# Altium PCB MainBoard.PcbDoc (part 1 of 3)
Units mil, origin at the board's own origin, x right, y up, seen from the top; angles counter-clockwise.
Board outline 11417.32 x 3858.27 mil, 2 copper layers (Top Layer, Bottom Layer); 222 components, 205 nets, 1642 pads, 0 vias.
Unrouted connection lines stored in the file: 802.
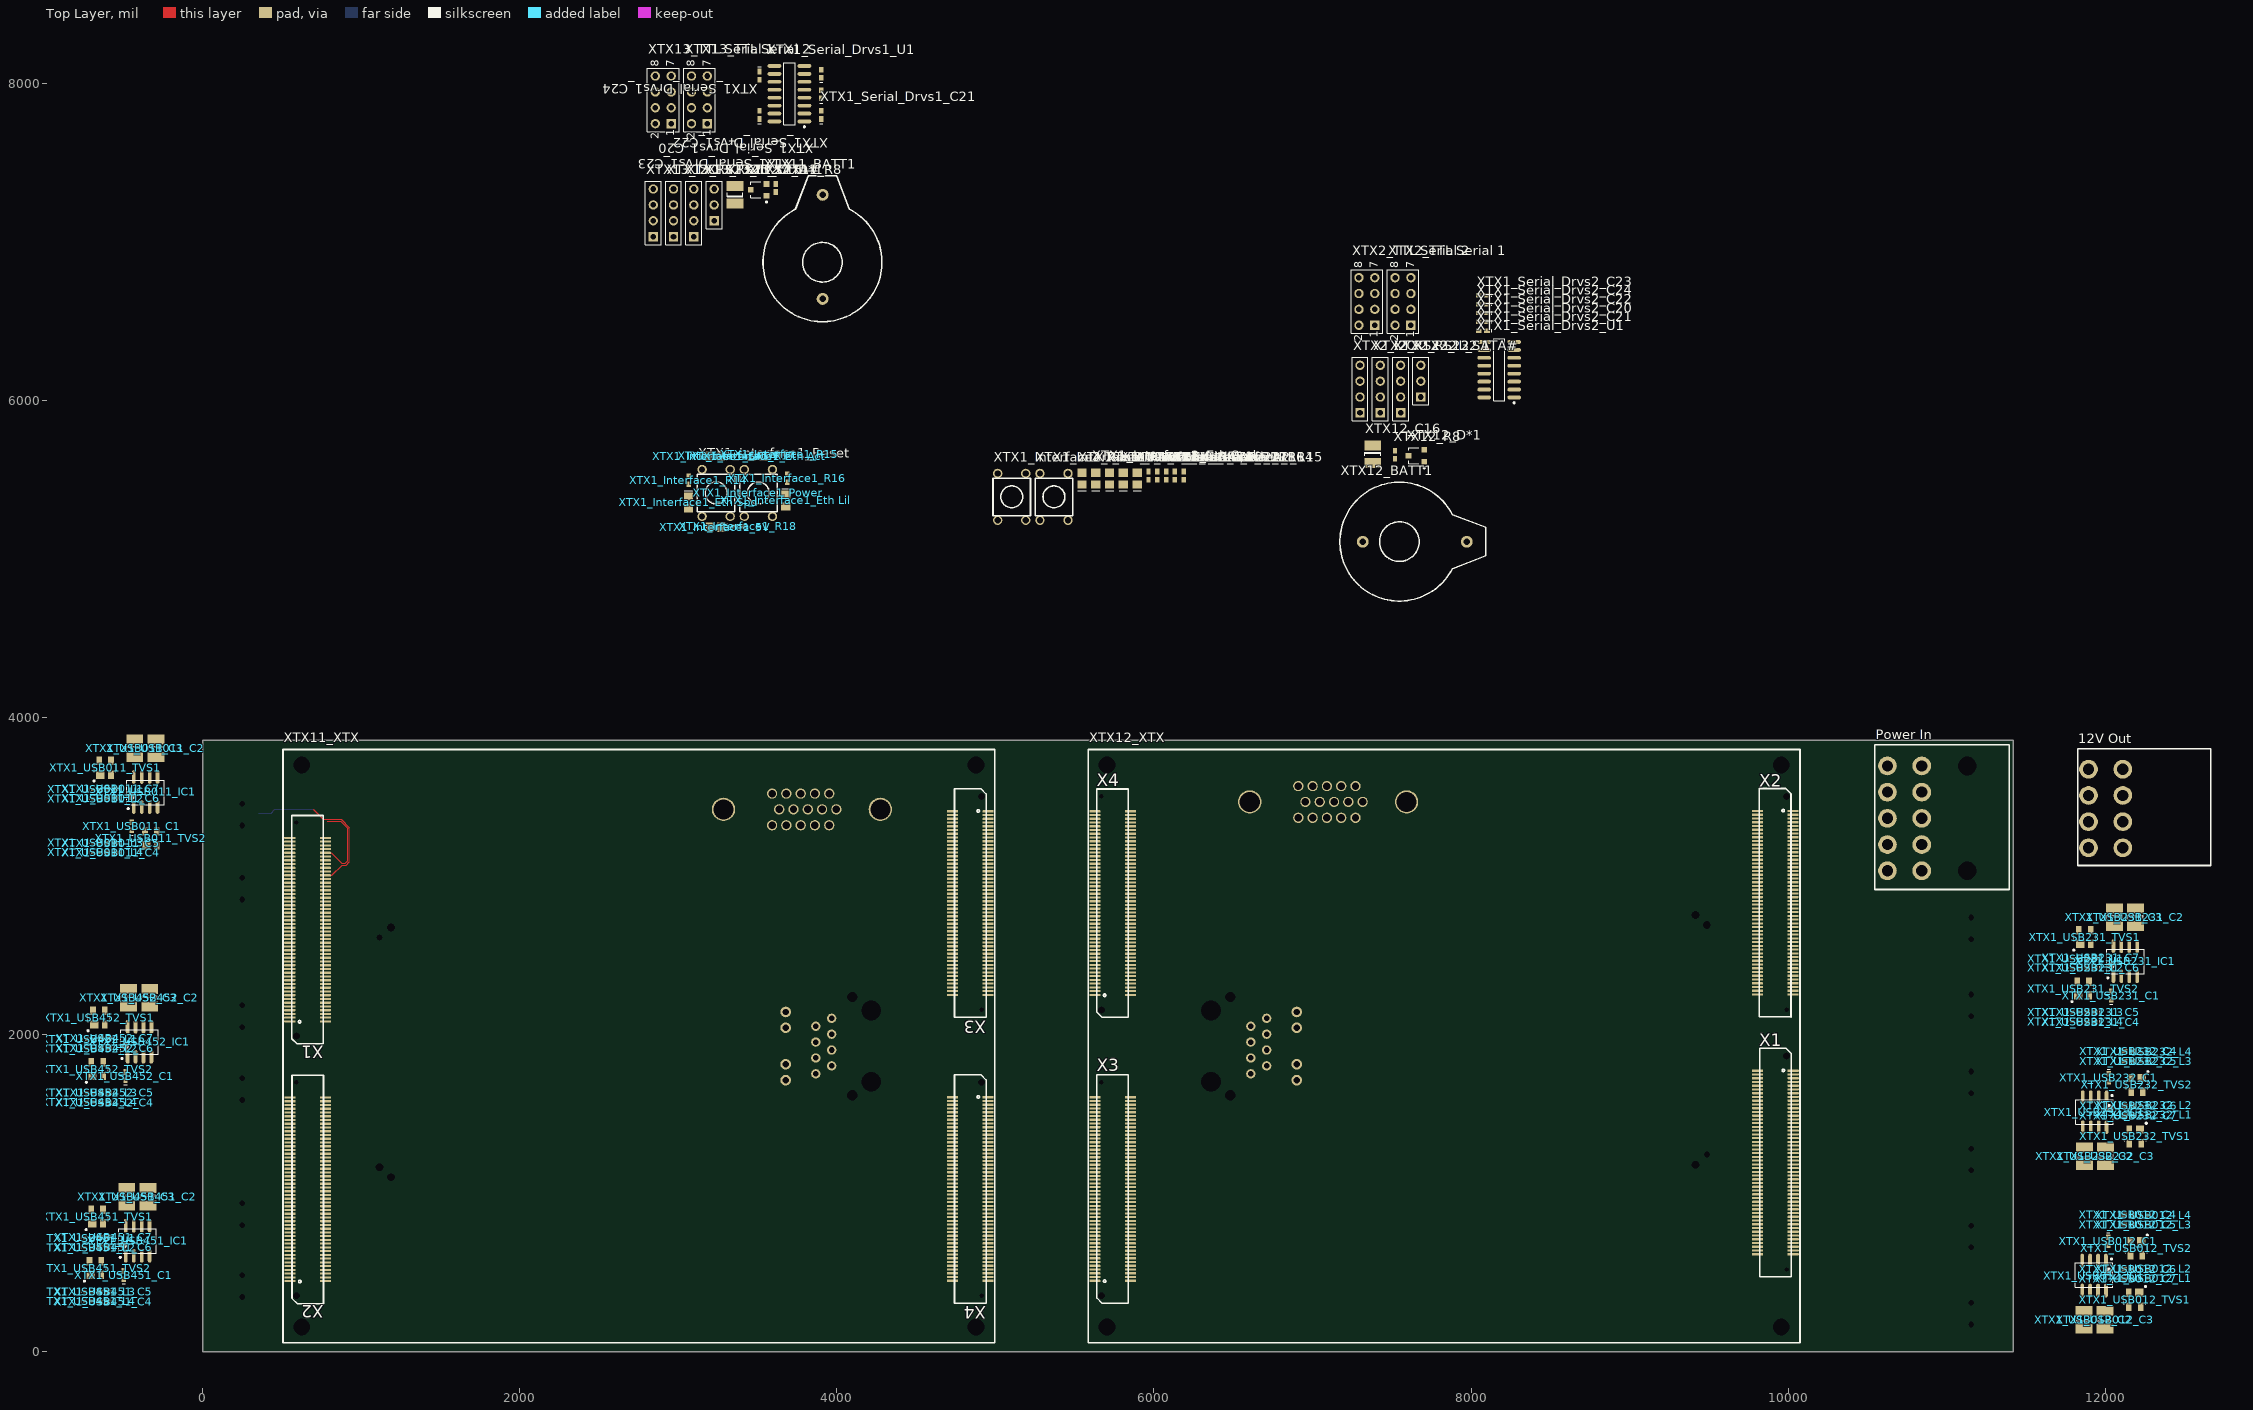
[diagram p0: Top Layer view]
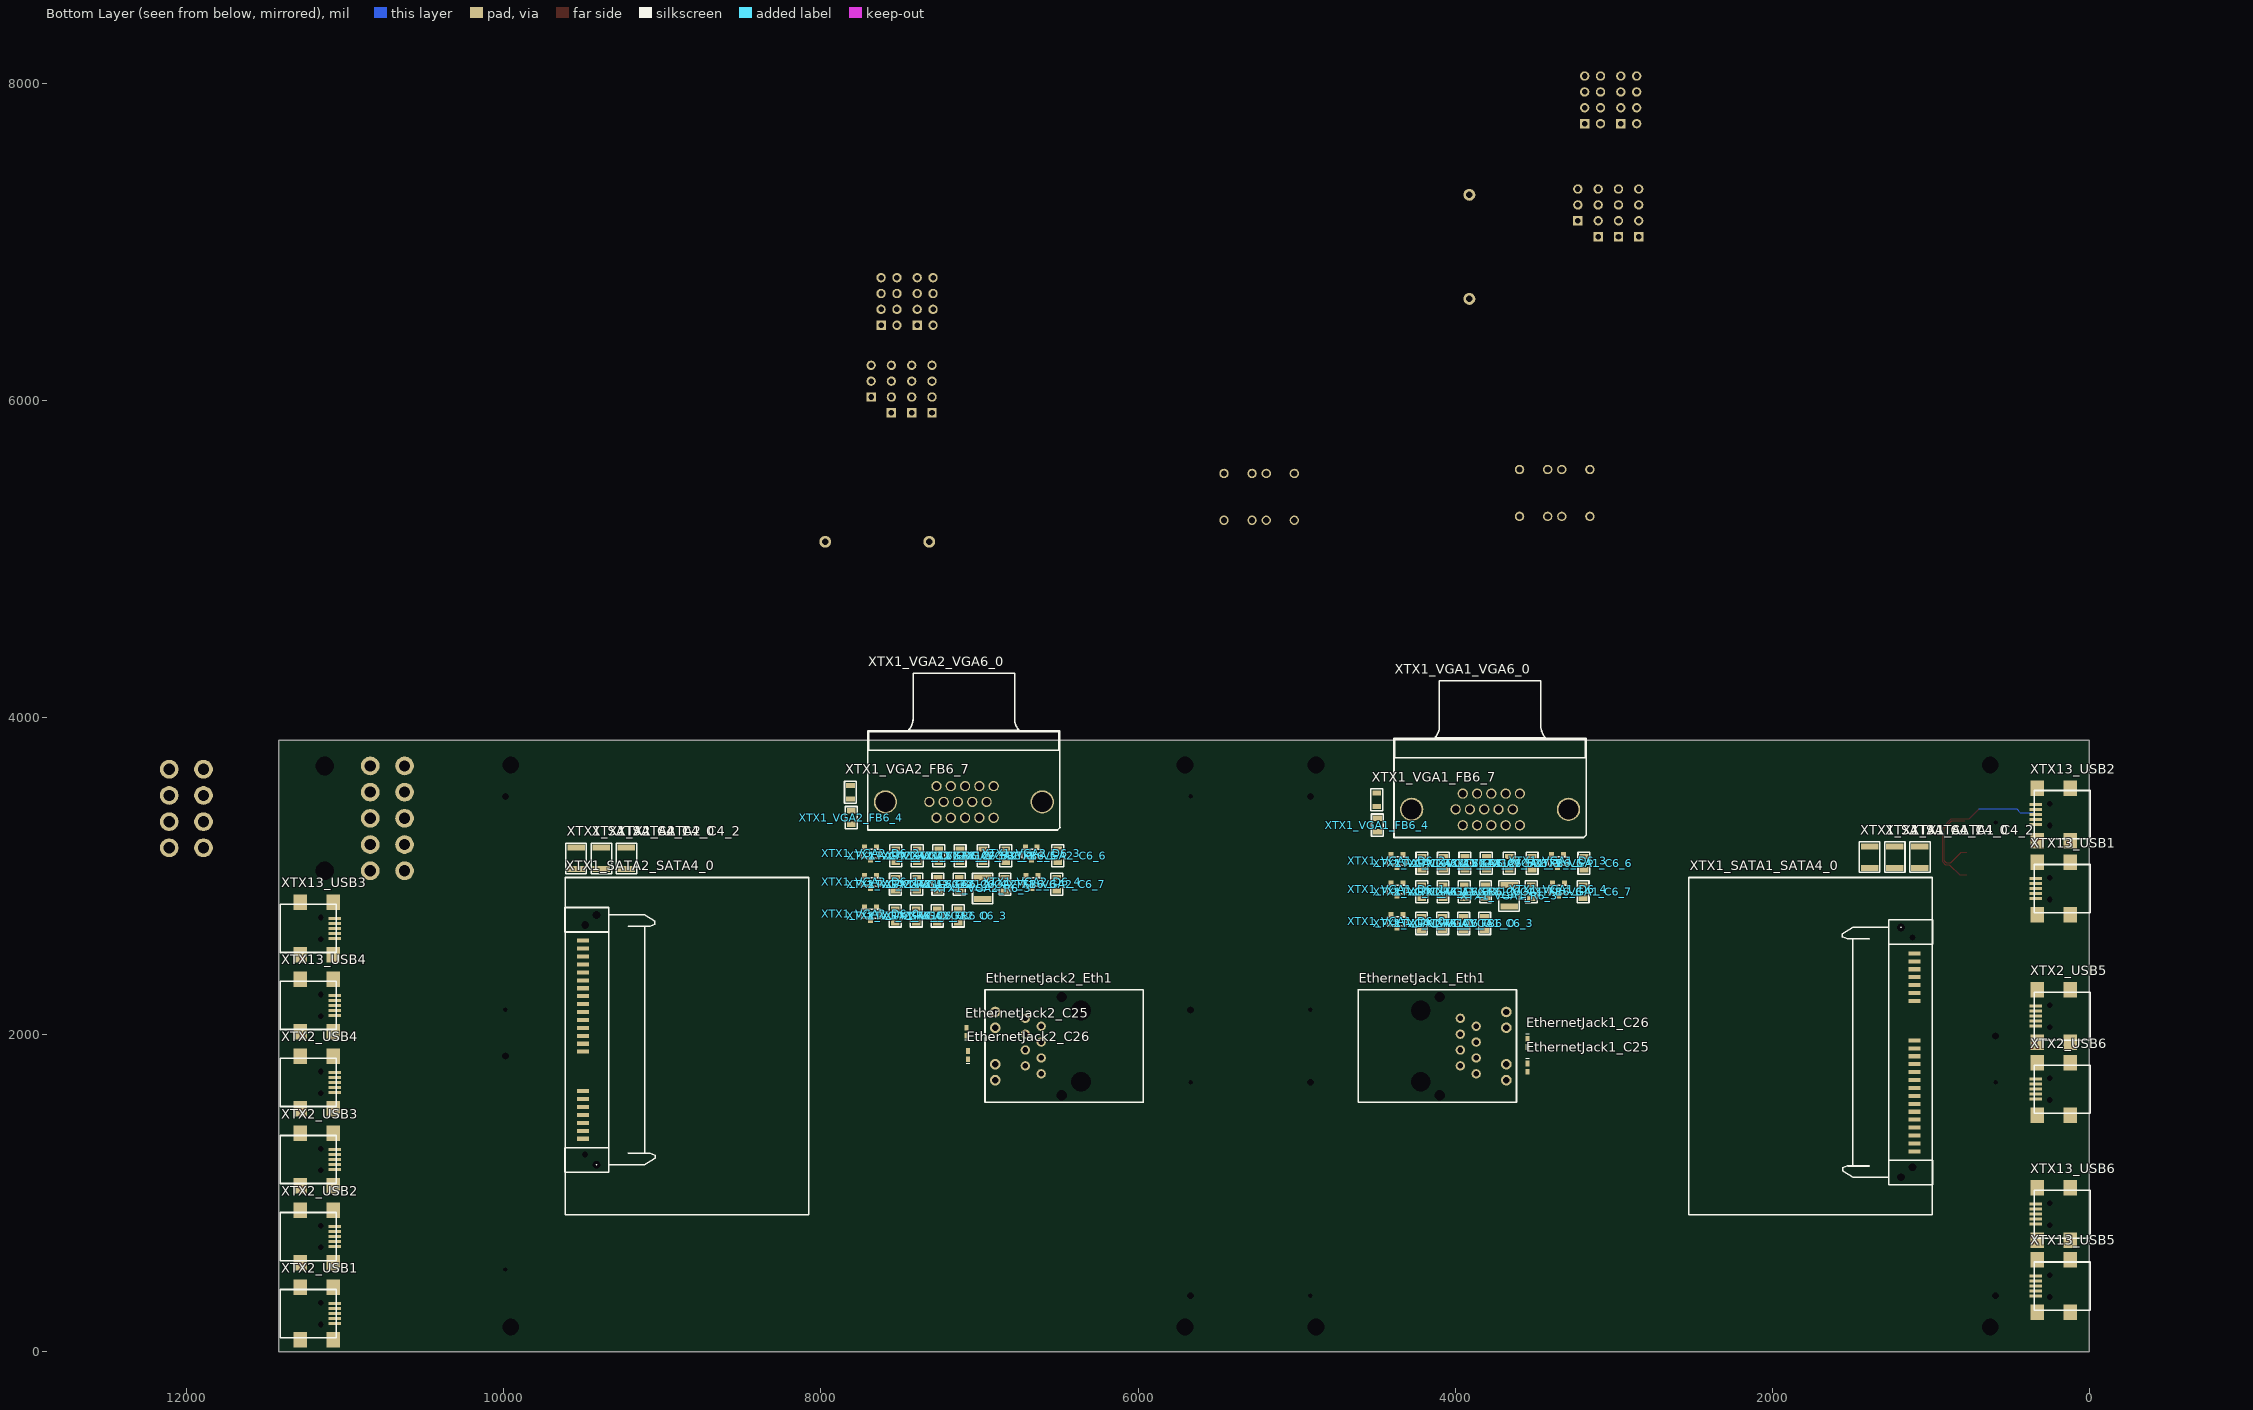
[diagram p1: Bottom Layer view, seen from below]

## Layer stack, top to bottom
Top Layer: signal copper 1.4
Dielectric: dielectric 12.6, FR-4, Dk 4.8
Bottom Layer: signal copper 1.4

## Board outline
0,0 0,3858.27 11417.32,3858.27 11417.32,0

## Design rules (kind name [scope] priority, off if disabled: settings)
Clearance [All] p1: gap=5
DiffPairsRouting "Schematic Differential Pairs Routing_31" [InNet('XTX1_USB012_OUT_USBA_P')] p1: maxlimit=7 minlimit=6 mostfreqgap=6 maxuncoupledlength=500
DiffPairsRouting "Schematic Differential Pairs Routing_30" [InNet('XTX1_USB012_OUT_USBB_N')] p2: maxlimit=7 minlimit=6 mostfreqgap=6 maxuncoupledlength=500
DiffPairsRouting "Schematic Differential Pairs Routing_29" [InNet('XTX1_USB452_OUT_USBA_N')] p3: maxlimit=7 minlimit=6 mostfreqgap=6 maxuncoupledlength=500
DiffPairsRouting "Schematic Differential Pairs Routing_28" [InNet('XTX1_USB012_OUT_USBA_N')] p4: maxlimit=7 minlimit=6 mostfreqgap=6 maxuncoupledlength=500
DiffPairsRouting "Schematic Differential Pairs Routing_27" [InNet('XTX1_USB232_OUT_USBA_N')] p5: maxlimit=7 minlimit=6 mostfreqgap=6 maxuncoupledlength=500
DiffPairsRouting "Schematic Differential Pairs Routing_26" [InNet('XTX1_USB012_OUT_USBB_P')] p6: maxlimit=7 minlimit=6 mostfreqgap=6 maxuncoupledlength=500
DiffPairsRouting "Schematic Differential Pairs Routing_25" [InNet('XTX1_USB232_OUT_USBA_P')] p7: maxlimit=7 minlimit=6 mostfreqgap=6 maxuncoupledlength=500
DiffPairsRouting "Schematic Differential Pairs Routing_24" [InNet('XTX1_USB452_OUT_USBA_P')] p8: maxlimit=7 minlimit=6 mostfreqgap=6 maxuncoupledlength=500
DiffPairsRouting "Schematic Differential Pairs Routing_23" [InNet('XTX1_USB232_OUT_USBB_N')] p9: maxlimit=7 minlimit=6 mostfreqgap=6 maxuncoupledlength=500
DiffPairsRouting "Schematic Differential Pairs Routing_22" [InNet('XTX1_USB011_OUT_USBA_N')] p10: maxlimit=7 minlimit=6 mostfreqgap=6 maxuncoupledlength=500
DiffPairsRouting "Schematic Differential Pairs Routing_21" [InNet('XTX1_USB232_OUT_USBB_P')] p11: maxlimit=7 minlimit=6 mostfreqgap=6 maxuncoupledlength=500
DiffPairsRouting "Schematic Differential Pairs Routing_20" [InNet('XTX1_USB452_OUT_USBB_N')] p12: maxlimit=7 minlimit=6 mostfreqgap=6 maxuncoupledlength=500
DiffPairsRouting "Schematic Differential Pairs Routing_19" [InNet('XTX1_USB452_OUT_USBB_P')] p13: maxlimit=7 minlimit=6 mostfreqgap=6 maxuncoupledlength=500
DiffPairsRouting "Schematic Differential Pairs Routing_18" [InNet('XTX1_USB451_OUT_USBA_P')] p14: maxlimit=7 minlimit=6 mostfreqgap=6 maxuncoupledlength=500
DiffPairsRouting "Schematic Differential Pairs Routing_17" [InNet('XTX1_USB451_OUT_USBA_N')] p15: maxlimit=7 minlimit=6 mostfreqgap=6 maxuncoupledlength=500
DiffPairsRouting "Schematic Differential Pairs Routing_16" [InNet('XTX1_USB451_OUT_USBB_P')] p16: maxlimit=7 minlimit=6 mostfreqgap=6 maxuncoupledlength=500
DiffPairsRouting "Schematic Differential Pairs Routing_15" [InNet('XTX1_USB451_OUT_USBB_N')] p17: maxlimit=7 minlimit=6 mostfreqgap=6 maxuncoupledlength=500
DiffPairsRouting "Schematic Differential Pairs Routing_14" [InNet('XTX1_USB231_OUT_USBB_P')] p18: maxlimit=7 minlimit=6 mostfreqgap=6 maxuncoupledlength=500
DiffPairsRouting "Schematic Differential Pairs Routing_13" [InNet('XTX1_USB231_OUT_USBB_N')] p19: maxlimit=7 minlimit=6 mostfreqgap=6 maxuncoupledlength=500
DiffPairsRouting "Schematic Differential Pairs Routing_12" [InNet('XTX1_USB231_OUT_USBA_P')] p20: maxlimit=7 minlimit=6 mostfreqgap=6 maxuncoupledlength=500
DiffPairsRouting "Schematic Differential Pairs Routing_11" [InNet('XTX1_USB231_OUT_USBA_N')] p21: maxlimit=7 minlimit=6 mostfreqgap=6 maxuncoupledlength=500
DiffPairsRouting "Schematic Differential Pairs Routing_10" [InNet('XTX1_USB011_OUT_USBB_P')] p22: maxlimit=7 minlimit=6 mostfreqgap=6 maxuncoupledlength=500
DiffPairsRouting "Schematic Differential Pairs Routing_9" [InNet('XTX1_USB011_OUT_USBB_N')] p23: maxlimit=7 minlimit=6 mostfreqgap=6 maxuncoupledlength=500
DiffPairsRouting "Schematic Differential Pairs Routing_8" [InNet('XTX1_USB011_OUT_USBA_P')] p24: maxlimit=7 minlimit=6 mostfreqgap=6 maxuncoupledlength=500
DiffPairsRouting "Schematic Differential Pairs Routing" [InNet('XTX1_SATA1_SATAIN_TX_P')] p25: maxlimit=7 minlimit=7 mostfreqgap=7 maxuncoupledlength=500
DiffPairsRouting "Schematic Differential Pairs Routing_1" [InNet('XTX1_SATA1_SATAIN_TX_N')] p26: maxlimit=7 minlimit=7 mostfreqgap=7 maxuncoupledlength=500
DiffPairsRouting "Schematic Differential Pairs Routing_2" [InNet('XTX1_SATA1_SATAIN_RX_P')] p27: maxlimit=7 minlimit=7 mostfreqgap=7 maxuncoupledlength=500
DiffPairsRouting "Schematic Differential Pairs Routing_3" [InNet('XTX1_SATA1_SATAIN_RX_N')] p28: maxlimit=7 minlimit=7 mostfreqgap=7 maxuncoupledlength=500
DiffPairsRouting "Schematic Differential Pairs Routing_5" [InNet('XTX1_SATA2_SATAIN_TX_N')] p29: maxlimit=7 minlimit=7 mostfreqgap=7 maxuncoupledlength=500
DiffPairsRouting "Schematic Differential Pairs Routing_6" [InNet('XTX1_SATA2_SATAIN_RX_P')] p30: maxlimit=7 minlimit=7 mostfreqgap=7 maxuncoupledlength=500
DiffPairsRouting "Schematic Differential Pairs Routing_7" [InNet('XTX1_SATA2_SATAIN_RX_N')] p31: maxlimit=7 minlimit=7 mostfreqgap=7 maxuncoupledlength=500
DiffPairsRouting "Schematic Differential Pairs Routing_4" [InNet('XTX1_SATA2_SATAIN_TX_P')] p32: maxlimit=7 minlimit=7 mostfreqgap=7 maxuncoupledlength=500
DiffPairsRouting [All] p33: maxlimit=10 minlimit=10 mostfreqgap=10 maxuncoupledlength=500
Length "Schematic Length Constraint_31" [InNet('XTX1_USB012_OUT_USBB_N')] p1: maxlimit=14000 minlimit=0
Length "Schematic Length Constraint_30" [InNet('XTX1_USB012_OUT_USBA_N')] p2: maxlimit=14000 minlimit=0
Length "Schematic Length Constraint_29" [InNet('XTX1_USB232_OUT_USBB_N')] p3: maxlimit=14000 minlimit=0
Length "Schematic Length Constraint_28" [InNet('XTX1_USB232_OUT_USBA_N')] p4: maxlimit=14000 minlimit=0
Length "Schematic Length Constraint_27" [InNet('XTX1_USB011_OUT_USBA_N')] p5: maxlimit=14000 minlimit=0
Length "Schematic Length Constraint_26" [InNet('XTX1_USB452_OUT_USBA_N')] p6: maxlimit=14000 minlimit=0
Length "Schematic Length Constraint_25" [InNet('XTX1_USB012_OUT_USBA_P')] p7: maxlimit=14000 minlimit=0
Length "Schematic Length Constraint_24" [InNet('XTX1_USB232_OUT_USBA_P')] p8: maxlimit=14000 minlimit=0
Length "Schematic Length Constraint_23" [InNet('XTX1_USB012_OUT_USBB_P')] p9: maxlimit=14000 minlimit=0
Length "Schematic Length Constraint_22" [InNet('XTX1_USB452_OUT_USBB_N')] p10: maxlimit=14000 minlimit=0
Length "Schematic Length Constraint_21" [InNet('XTX1_USB452_OUT_USBB_P')] p11: maxlimit=14000 minlimit=0
Length "Schematic Length Constraint_20" [InNet('XTX1_USB452_OUT_USBA_P')] p12: maxlimit=14000 minlimit=0
Length "Schematic Length Constraint_19" [InNet('XTX1_USB232_OUT_USBB_P')] p13: maxlimit=14000 minlimit=0
Length "Schematic Length Constraint_18" [InNet('XTX1_USB451_OUT_USBA_P')] p14: maxlimit=14000 minlimit=0
Length "Schematic Length Constraint_17" [InNet('XTX1_USB451_OUT_USBA_N')] p15: maxlimit=14000 minlimit=0
Length "Schematic Length Constraint_16" [InNet('XTX1_USB451_OUT_USBB_P')] p16: maxlimit=14000 minlimit=0
Length "Schematic Length Constraint_15" [InNet('XTX1_USB451_OUT_USBB_N')] p17: maxlimit=14000 minlimit=0
Length "Schematic Length Constraint_14" [InNet('XTX1_USB231_OUT_USBB_P')] p18: maxlimit=14000 minlimit=0
Length "Schematic Length Constraint_13" [InNet('XTX1_USB231_OUT_USBB_N')] p19: maxlimit=14000 minlimit=0
Length "Schematic Length Constraint_12" [InNet('XTX1_USB231_OUT_USBA_P')] p20: maxlimit=14000 minlimit=0
Length "Schematic Length Constraint_11" [InNet('XTX1_USB231_OUT_USBA_N')] p21: maxlimit=14000 minlimit=0
Length "Schematic Length Constraint_10" [InNet('XTX1_USB011_OUT_USBB_P')] p22: maxlimit=14000 minlimit=0
Length "Schematic Length Constraint_9" [InNet('XTX1_USB011_OUT_USBB_N')] p23: maxlimit=14000 minlimit=0
Length "Schematic Length Constraint_8" [InNet('XTX1_USB011_OUT_USBA_P')] p24: maxlimit=14000 minlimit=0
Length "Schematic Length Constraint" [InNet('XTX1_SATA1_SATAIN_TX_P')] p25: maxlimit=4500 minlimit=0
Length "Schematic Length Constraint_1" [InNet('XTX1_SATA1_SATAIN_TX_N')] p26: maxlimit=4500 minlimit=0
Length "Schematic Length Constraint_2" [InNet('XTX1_SATA1_SATAIN_RX_P')] p27: maxlimit=4500 minlimit=0
Length "Schematic Length Constraint_3" [InNet('XTX1_SATA1_SATAIN_RX_N')] p28: maxlimit=4500 minlimit=0
Length "Schematic Length Constraint_6" [InNet('XTX1_SATA2_SATAIN_RX_P')] p29: maxlimit=4500 minlimit=0
Length "Schematic Length Constraint_7" [InNet('XTX1_SATA2_SATAIN_RX_N')] p30: maxlimit=4500 minlimit=0
Length "Schematic Length Constraint_4" [InNet('XTX1_SATA2_SATAIN_TX_P')] p31: maxlimit=4500 minlimit=0
Length "Schematic Length Constraint_5" [InNet('XTX1_SATA2_SATAIN_TX_N')] p32: maxlimit=4500 minlimit=0
MatchedLengths "Schematic Matched Net Lengths_31" [InNet('XTX1_USB011_OUT_USBA_N')] p1: tolerance=150 checknetsindiffpair=TRUE checkdiffpairvsdiffpair=FALSE checkothers=FALSE
MatchedLengths "Schematic Matched Net Lengths_30" [InNet('XTX1_USB012_OUT_USBA_N')] p2: tolerance=150 checknetsindiffpair=TRUE checkdiffpairvsdiffpair=FALSE checkothers=FALSE
MatchedLengths "Schematic Matched Net Lengths_29" [InNet('XTX1_USB232_OUT_USBA_P')] p3: tolerance=150 checknetsindiffpair=TRUE checkdiffpairvsdiffpair=FALSE checkothers=FALSE
MatchedLengths "Schematic Matched Net Lengths_28" [InNet('XTX1_USB012_OUT_USBA_P')] p4: tolerance=150 checknetsindiffpair=TRUE checkdiffpairvsdiffpair=FALSE checkothers=FALSE
MatchedLengths "Schematic Matched Net Lengths_27" [InNet('XTX1_USB012_OUT_USBB_P')] p5: tolerance=150 checknetsindiffpair=TRUE checkdiffpairvsdiffpair=FALSE checkothers=FALSE
MatchedLengths "Schematic Matched Net Lengths_26" [InNet('XTX1_USB452_OUT_USBA_P')] p6: tolerance=150 checknetsindiffpair=TRUE checkdiffpairvsdiffpair=FALSE checkothers=FALSE
MatchedLengths "Schematic Matched Net Lengths_25" [InNet('XTX1_USB012_OUT_USBB_N')] p7: tolerance=150 checknetsindiffpair=TRUE checkdiffpairvsdiffpair=FALSE checkothers=FALSE
MatchedLengths "Schematic Matched Net Lengths_24" [InNet('XTX1_USB232_OUT_USBB_N')] p8: tolerance=150 checknetsindiffpair=TRUE checkdiffpairvsdiffpair=FALSE checkothers=FALSE
MatchedLengths "Schematic Matched Net Lengths_23" [InNet('XTX1_USB232_OUT_USBA_N')] p9: tolerance=150 checknetsindiffpair=TRUE checkdiffpairvsdiffpair=FALSE checkothers=FALSE
MatchedLengths "Schematic Matched Net Lengths_22" [InNet('XTX1_USB232_OUT_USBB_P')] p10: tolerance=150 checknetsindiffpair=TRUE checkdiffpairvsdiffpair=FALSE checkothers=FALSE
MatchedLengths "Schematic Matched Net Lengths_21" [InNet('XTX1_USB452_OUT_USBB_P')] p11: tolerance=150 checknetsindiffpair=TRUE checkdiffpairvsdiffpair=FALSE checkothers=FALSE
MatchedLengths "Schematic Matched Net Lengths_20" [InNet('XTX1_USB452_OUT_USBB_N')] p12: tolerance=150 checknetsindiffpair=TRUE checkdiffpairvsdiffpair=FALSE checkothers=FALSE
MatchedLengths "Schematic Matched Net Lengths_19" [InNet('XTX1_USB452_OUT_USBA_N')] p13: tolerance=150 checknetsindiffpair=TRUE checkdiffpairvsdiffpair=FALSE checkothers=FALSE
MatchedLengths "Schematic Matched Net Lengths_18" [InNet('XTX1_USB451_OUT_USBA_P')] p14: tolerance=150 checknetsindiffpair=TRUE checkdiffpairvsdiffpair=FALSE checkothers=FALSE
MatchedLengths "Schematic Matched Net Lengths_17" [InNet('XTX1_USB451_OUT_USBA_N')] p15: tolerance=150 checknetsindiffpair=TRUE checkdiffpairvsdiffpair=FALSE checkothers=FALSE
MatchedLengths "Schematic Matched Net Lengths_16" [InNet('XTX1_USB451_OUT_USBB_P')] p16: tolerance=150 checknetsindiffpair=TRUE checkdiffpairvsdiffpair=FALSE checkothers=FALSE
MatchedLengths "Schematic Matched Net Lengths_15" [InNet('XTX1_USB451_OUT_USBB_N')] p17: tolerance=150 checknetsindiffpair=TRUE checkdiffpairvsdiffpair=FALSE checkothers=FALSE
MatchedLengths "Schematic Matched Net Lengths_14" [InNet('XTX1_USB231_OUT_USBB_P')] p18: tolerance=150 checknetsindiffpair=TRUE checkdiffpairvsdiffpair=FALSE checkothers=FALSE
MatchedLengths "Schematic Matched Net Lengths_13" [InNet('XTX1_USB231_OUT_USBB_N')] p19: tolerance=150 checknetsindiffpair=TRUE checkdiffpairvsdiffpair=FALSE checkothers=FALSE
MatchedLengths "Schematic Matched Net Lengths_12" [InNet('XTX1_USB231_OUT_USBA_P')] p20: tolerance=150 checknetsindiffpair=TRUE checkdiffpairvsdiffpair=FALSE checkothers=FALSE
MatchedLengths "Schematic Matched Net Lengths_11" [InNet('XTX1_USB231_OUT_USBA_N')] p21: tolerance=150 checknetsindiffpair=TRUE checkdiffpairvsdiffpair=FALSE checkothers=FALSE
MatchedLengths "Schematic Matched Net Lengths_10" [InNet('XTX1_USB011_OUT_USBB_P')] p22: tolerance=150 checknetsindiffpair=TRUE checkdiffpairvsdiffpair=FALSE checkothers=FALSE
MatchedLengths "Schematic Matched Net Lengths_9" [InNet('XTX1_USB011_OUT_USBB_N')] p23: tolerance=150 checknetsindiffpair=TRUE checkdiffpairvsdiffpair=FALSE checkothers=FALSE
MatchedLengths "Schematic Matched Net Lengths_8" [InNet('XTX1_USB011_OUT_USBA_P')] p24: tolerance=150 checknetsindiffpair=TRUE checkdiffpairvsdiffpair=FALSE checkothers=FALSE
MatchedLengths "Schematic Matched Net Lengths" [InNet('XTX1_SATA1_SATAIN_TX_P')] p25: tolerance=5 checknetsindiffpair=TRUE checkdiffpairvsdiffpair=FALSE checkothers=FALSE
MatchedLengths "Schematic Matched Net Lengths_1" [InNet('XTX1_SATA1_SATAIN_TX_N')] p26: tolerance=5 checknetsindiffpair=TRUE checkdiffpairvsdiffpair=FALSE checkothers=FALSE
MatchedLengths "Schematic Matched Net Lengths_2" [InNet('XTX1_SATA1_SATAIN_RX_P')] p27: tolerance=5 checknetsindiffpair=TRUE checkdiffpairvsdiffpair=FALSE checkothers=FALSE
MatchedLengths "Schematic Matched Net Lengths_3" [InNet('XTX1_SATA1_SATAIN_RX_N')] p28: tolerance=5 checknetsindiffpair=TRUE checkdiffpairvsdiffpair=FALSE checkothers=FALSE
MatchedLengths "Schematic Matched Net Lengths_4" [InNet('XTX1_SATA2_SATAIN_TX_P')] p29: tolerance=5 checknetsindiffpair=TRUE checkdiffpairvsdiffpair=FALSE checkothers=FALSE
MatchedLengths "Schematic Matched Net Lengths_5" [InNet('XTX1_SATA2_SATAIN_TX_N')] p30: tolerance=5 checknetsindiffpair=TRUE checkdiffpairvsdiffpair=FALSE checkothers=FALSE
MatchedLengths "Schematic Matched Net Lengths_7" [InNet('XTX1_SATA2_SATAIN_RX_P')] p31: tolerance=5 checknetsindiffpair=TRUE checkdiffpairvsdiffpair=FALSE checkothers=FALSE
MatchedLengths "Schematic Matched Net Lengths_6" [InNet('XTX1_SATA2_SATAIN_RX_N')] p32: tolerance=5 checknetsindiffpair=TRUE checkdiffpairvsdiffpair=FALSE checkothers=FALSE
PolygonConnect [All] p1: connectstyle=Relief reliefconductorwidth=10 reliefentries=4 polygonreliefangle="90 Angle"
RoomDefinition XTX1_USB011 [InComponentClass('XTX1_USB011')] p1: confinementstyle=ConfineIn formatcopy=TRUE lockcomponents=FALSE outline 1151.3,9566.93 1151.3,10362.2 635.55,10362.2 635.55,9566.93
RoomDefinition XTX1_USB012 [InComponentClass('XTX1_USB012')] p2: confinementstyle=ConfineIn formatcopy=TRUE lockcomponents=FALSE outline 300.91,9680 300.91,10475.28 -214.84,10475.28 -214.84,9680
RoomDefinition XTX1_USB231 [InComponentClass('XTX1_USB231')] p3: confinementstyle=ConfineIn formatcopy=TRUE lockcomponents=FALSE outline 1186.73,8553.9 1186.73,9349.17 670.98,9349.17 670.98,8553.9
RoomDefinition XTX1_USB232 [InComponentClass('XTX1_USB232')] p4: confinementstyle=ConfineIn formatcopy=TRUE lockcomponents=FALSE outline 304.84,8530.31 304.84,9325.59 -210.91,9325.59 -210.91,8530.31
RoomDefinition XTX1_USB452 [InComponentClass('XTX1_USB452')] p5: confinementstyle=ConfineIn formatcopy=TRUE lockcomponents=FALSE outline 370.08,7362.2 370.08,8157.48 -145.67,8157.48 -145.67,7362.2
RoomDefinition XTX1_VGA2 [InComponentClass('XTX1_VGA2')] p6: confinementstyle=ConfineIn formatcopy=TRUE lockcomponents=FALSE outline 4866.14,2366.14 8066.93,2366.14 8066.93,5287.4 4866.14,5287.4
RoomDefinition MainSheet [InComponentClass('MainSheet')] p7: confinementstyle=ConfineIn formatcopy=TRUE lockcomponents=FALSE outline -984.25,-984.25 11492.13,-984.25 11492.13,4492.13 -984.25,4492.13
RoomDefinition XTX13 [InComponentClass('XTX13')] p8: confinementstyle=ConfineIn formatcopy=TRUE lockcomponents=FALSE outline -984.25,-984.25 11503.94,-984.25 11503.94,4464.57 -984.25,4464.57
RoomDefinition XTX12 [InComponentClass('XTX12')] p9: confinementstyle=ConfineIn formatcopy=TRUE lockcomponents=FALSE outline -984.25,-984.25 11468.5,-984.25 11468.5,4405.51 -984.25,4405.51
RoomDefinition XTX11 [InComponentClass('XTX11')] p10: confinementstyle=ConfineIn formatcopy=TRUE lockcomponents=FALSE outline -984.25,-984.25 11515.75,-984.25 11515.75,4511.81 -984.25,4511.81
RoomDefinition XTX1_VGA1 [InComponentClass('XTX1_VGA1')] p11: confinementstyle=ConfineIn formatcopy=TRUE lockcomponents=FALSE outline 1547.24,2318.9 4748.03,2318.9 4748.03,5240.16 1547.24,5240.16
RoomDefinition XTX1_SATA2 [InComponentClass('XTX1_SATA2')] p12: confinementstyle=ConfineIn formatcopy=TRUE lockcomponents=FALSE outline 5405.51,4500 11484.25,4500 11484.25,-633.86 5405.51,-633.86
RoomDefinition XTX1_SATA1 [InComponentClass('XTX1_SATA1')] p13: confinementstyle=ConfineIn formatcopy=TRUE lockcomponents=FALSE outline -66.93,4429.13 5437.01,4429.13 5437.01,-586.61 -66.93,-586.61
RoomDefinition EthernetJack2 [InComponentClass('EthernetJack2')] p14: confinementstyle=ConfineIn formatcopy=TRUE lockcomponents=FALSE outline 5515.75,-952.76 5515.75,2830.71 7267.72,2830.71 7267.72,-952.76
RoomDefinition EthernetJack1 [InComponentClass('EthernetJack1')] p15: confinementstyle=ConfineIn formatcopy=TRUE lockcomponents=FALSE outline 5594.49,5003.94 5594.49,70.87 3448.23,70.87 3448.23,5003.94
RoomDefinition XTX1_Interface1 [InComponentClass('XTX1_Interface1')] p16: confinementstyle=ConfineIn formatcopy=TRUE lockcomponents=FALSE outline 2245.79,7259.84 3846.46,7259.84 3846.46,8278.31 2245.79,8278.31
RoomDefinition XTX1_Interface2 [InComponentClass('XTX1_Interface2')] p17: confinementstyle=ConfineIn formatcopy=TRUE lockcomponents=FALSE outline -750.28,4563.94 574.8,4563.94 574.8,5053.94 -750.28,5053.94
RoomDefinition XTX1_Serial_Drvs1 [InComponentClass('XTX1_Serial_Drvs1')] p18: confinementstyle=ConfineIn formatcopy=TRUE lockcomponents=FALSE outline 4446.57,7468.5 5641.73,7468.5 5641.73,8308.7 4446.57,8308.7
RoomDefinition XTX1_Serial_Drvs2 [InComponentClass('XTX1_Serial_Drvs2')] p19: confinementstyle=ConfineIn formatcopy=TRUE lockcomponents=FALSE outline 5726.1,7632.83 6492.13,7632.83 6492.13,8052.83 5726.1,8052.83
RoomDefinition XTX1_USB451 [InComponentClass('XTX1_USB451')] p20: confinementstyle=ConfineIn formatcopy=TRUE lockcomponents=FALSE outline 1261.54,7356.97 1261.54,8152.24 745.79,8152.24 745.79,7356.97
RoomDefinition XTX2 [InComponentClass('XTX2')] p21: confinementstyle=ConfineIn formatcopy=TRUE lockcomponents=FALSE outline -47.24,-720.47 11417.32,-720.47 11417.32,7078.74 -47.24,7078.74
RoutingVias [All] p1: holewidth=28 width=50 viastyle="Through Hole" minholewidth=28 minwidth=50 maxholewidth=28 maxwidth=50
SolderMaskExpansion [All] p1: expansion=4
TestPointUsage [All] p1: valid=0 allowmultiple=FALSE
Testpoint [All] p1: side=15 testpointundercomponent=TRUE minsize=40 maxsize=100 preferedsize=60 minholesize=0 maxholesize=40 preferedholesize=32 testpointgrid=1 style=1023 order=0-112345678
Width "Schematic Width Constraint_31" [InNet('XTX1_USB012_OUT_USBB_N')] p1: maxlimit=6 minlimit=6 preferedwidth=6
Width "Schematic Width Constraint_30" [InNet('XTX1_USB232_OUT_USBA_P')] p2: maxlimit=6 minlimit=6 preferedwidth=6
Width "Schematic Width Constraint_29" [InNet('XTX1_USB011_OUT_USBA_N')] p3: maxlimit=6 minlimit=6 preferedwidth=6
Width "Schematic Width Constraint_28" [InNet('XTX1_USB012_OUT_USBA_N')] p4: maxlimit=6 minlimit=6 preferedwidth=6
Width "Schematic Width Constraint_27" [InNet('XTX1_USB012_OUT_USBA_P')] p5: maxlimit=6 minlimit=6 preferedwidth=6
Width "Schematic Width Constraint_26" [InNet('XTX1_USB452_OUT_USBA_N')] p6: maxlimit=6 minlimit=6 preferedwidth=6
Width "Schematic Width Constraint_25" [InNet('XTX1_USB012_OUT_USBB_P')] p7: maxlimit=6 minlimit=6 preferedwidth=6
Width "Schematic Width Constraint_24" [InNet('XTX1_USB232_OUT_USBA_N')] p8: maxlimit=6 minlimit=6 preferedwidth=6
Width "Schematic Width Constraint_23" [InNet('XTX1_USB232_OUT_USBB_N')] p9: maxlimit=6 minlimit=6 preferedwidth=6
Width "Schematic Width Constraint_22" [InNet('XTX1_USB232_OUT_USBB_P')] p10: maxlimit=6 minlimit=6 preferedwidth=6
Width "Schematic Width Constraint_21" [InNet('XTX1_USB452_OUT_USBA_P')] p11: maxlimit=6 minlimit=6 preferedwidth=6
Width "Schematic Width Constraint_19" [InNet('XTX1_USB452_OUT_USBB_N')] p12: maxlimit=6 minlimit=6 preferedwidth=6
Width "Schematic Width Constraint_16" [InNet('XTX1_USB452_OUT_USBB_P')] p13: maxlimit=6 minlimit=6 preferedwidth=6
Width "Schematic Width Constraint_14" [InNet('XTX1_USB451_OUT_USBA_P')] p14: maxlimit=6 minlimit=6 preferedwidth=6
Width "Schematic Width Constraint_13" [InNet('XTX1_USB451_OUT_USBA_N')] p15: maxlimit=6 minlimit=6 preferedwidth=6
Width "Schematic Width Constraint_12" [InNet('XTX1_USB451_OUT_USBB_P')] p16: maxlimit=6 minlimit=6 preferedwidth=6
Width "Schematic Width Constraint_11" [InNet('XTX1_USB451_OUT_USBB_N')] p17: maxlimit=6 minlimit=6 preferedwidth=6
Width "Schematic Width Constraint_10" [InNet('XTX1_USB231_OUT_USBB_P')] p18: maxlimit=6 minlimit=6 preferedwidth=6
Width "Schematic Width Constraint_9" [InNet('XTX1_USB231_OUT_USBB_N')] p19: maxlimit=6 minlimit=6 preferedwidth=6
Width "Schematic Width Constraint_8" [InNet('XTX1_USB231_OUT_USBA_P')] p20: maxlimit=6 minlimit=6 preferedwidth=6
Width "Schematic Width Constraint_7" [InNet('XTX1_USB231_OUT_USBA_N')] p21: maxlimit=6 minlimit=6 preferedwidth=6
Width "Schematic Width Constraint_6" [InNet('XTX1_USB011_OUT_USBB_P')] p22: maxlimit=6 minlimit=6 preferedwidth=6
Width "Schematic Width Constraint_5" [InNet('XTX1_USB011_OUT_USBB_N')] p23: maxlimit=6 minlimit=6 preferedwidth=6
Width "Schematic Width Constraint_4" [InNet('XTX1_USB011_OUT_USBA_P')] p24: maxlimit=6 minlimit=6 preferedwidth=6
Width [All] p25: maxlimit=10 minlimit=6 preferedwidth=10
Width "Schematic Width Constraint" [InNet('XTX1_SATA1_SATAIN_TX_P')] p26: maxlimit=6 minlimit=6 preferedwidth=6
Width "Schematic Width Constraint_1" [InNet('XTX1_SATA1_SATAIN_TX_N')] p27: maxlimit=6 minlimit=6 preferedwidth=6
Width "Schematic Width Constraint_2" [InNet('XTX1_SATA1_SATAIN_RX_P')] p28: maxlimit=6 minlimit=6 preferedwidth=6
Width "Schematic Width Constraint_3" [InNet('XTX1_SATA1_SATAIN_RX_N')] p29: maxlimit=6 minlimit=6 preferedwidth=6
Width "Schematic Width Constraint_18" [InNet('XTX1_SATA2_SATAIN_RX_P')] p30: maxlimit=6 minlimit=6 preferedwidth=6
Width "Schematic Width Constraint_20" [InNet('XTX1_SATA2_SATAIN_RX_N')] p31: maxlimit=6 minlimit=6 preferedwidth=6
Width "Schematic Width Constraint_17" [InNet('XTX1_SATA2_SATAIN_TX_N')] p32: maxlimit=6 minlimit=6 preferedwidth=6
Width "Schematic Width Constraint_15" [InNet('XTX1_SATA2_SATAIN_TX_P')] p33: maxlimit=6 minlimit=6 preferedwidth=6
Width "Schematic Width Constraint_33" [InNet('12VCC')] p34: maxlimit=100 minlimit=25 preferedwidth=25
Width "Schematic Width Constraint_32" [InNet('12VCC')] p35: maxlimit=100 minlimit=25 preferedwidth=25
18 further rules are at their usual default settings.

## Classes and differential pairs
component class EthernetJack1: EthernetJack1_C25 EthernetJack1_C26 EthernetJack1_Eth1
component class EthernetJack2: EthernetJack2_C25 EthernetJack2_C26 EthernetJack2_Eth1
component class XTX1_Interface1: XTX1_Interface1_5V "XTX1_Interface1_Eth Act" "XTX1_Interface1_Eth Lil" "XTX1_Interface1_Eth Spd" XTX1_Interface1_Power XTX1_Interface1_R14 XTX1_Interface1_R15 XTX1_Interface1_R16 XTX1_Interface1_R17 XTX1_Interface1_R18 XTX1_Interface1_Reset XTX1_Interface1_SATA
component class XTX1_Interface2: XTX1_Interface2_5V "XTX1_Interface2_Eth Act" "XTX1_Interface2_Eth Lil" "XTX1_Interface2_Eth Spd" XTX1_Interface2_Power XTX1_Interface2_R14 XTX1_Interface2_R15 XTX1_Interface2_R16 XTX1_Interface2_R17 XTX1_Interface2_R18 XTX1_Interface2_Reset XTX1_Interface2_SATA
component class XTX1_SATA1: XTX1_SATA1_C4_0 XTX1_SATA1_C4_1 XTX1_SATA1_C4_2 XTX1_SATA1_SATA4_0
component class XTX1_SATA2: XTX1_SATA2_C4_0 XTX1_SATA2_C4_1 XTX1_SATA2_C4_2 XTX1_SATA2_SATA4_0
component class XTX1_Serial_Drvs1: XTX1_Serial_Drvs1_C20 XTX1_Serial_Drvs1_C21 XTX1_Serial_Drvs1_C22 XTX1_Serial_Drvs1_C23 XTX1_Serial_Drvs1_C24 XTX1_Serial_Drvs1_U1
component class XTX1_Serial_Drvs2: XTX1_Serial_Drvs2_C20 XTX1_Serial_Drvs2_C21 XTX1_Serial_Drvs2_C22 XTX1_Serial_Drvs2_C23 XTX1_Serial_Drvs2_C24 XTX1_Serial_Drvs2_U1
component class XTX1_USB011: XTX1_USB011_C1 XTX1_USB011_C2 XTX1_USB011_C3 XTX1_USB011_C4 XTX1_USB011_C5 XTX1_USB011_C6 XTX1_USB011_C7 XTX1_USB011_IC1 XTX1_USB011_L1 XTX1_USB011_L2 XTX1_USB011_L3 XTX1_USB011_L4 XTX1_USB011_TVS1 XTX1_USB011_TVS2
component class XTX1_USB012: XTX1_USB012_C1 XTX1_USB012_C2 XTX1_USB012_C3 XTX1_USB012_C4 XTX1_USB012_C5 XTX1_USB012_C6 XTX1_USB012_C7 XTX1_USB012_IC1 XTX1_USB012_L1 XTX1_USB012_L2 XTX1_USB012_L3 XTX1_USB012_L4 XTX1_USB012_TVS1 XTX1_USB012_TVS2
component class XTX1_USB231: XTX1_USB231_C1 XTX1_USB231_C2 XTX1_USB231_C3 XTX1_USB231_C4 XTX1_USB231_C5 XTX1_USB231_C6 XTX1_USB231_C7 XTX1_USB231_IC1 XTX1_USB231_L1 XTX1_USB231_L2 XTX1_USB231_L3 XTX1_USB231_L4 XTX1_USB231_TVS1 XTX1_USB231_TVS2
component class XTX1_USB232: XTX1_USB232_C1 XTX1_USB232_C2 XTX1_USB232_C3 XTX1_USB232_C4 XTX1_USB232_C5 XTX1_USB232_C6 XTX1_USB232_C7 XTX1_USB232_IC1 XTX1_USB232_L1 XTX1_USB232_L2 XTX1_USB232_L3 XTX1_USB232_L4 XTX1_USB232_TVS1 XTX1_USB232_TVS2
component class XTX1_USB451: XTX1_USB451_C1 XTX1_USB451_C2 XTX1_USB451_C3 XTX1_USB451_C4 XTX1_USB451_C5 XTX1_USB451_C6 XTX1_USB451_C7 XTX1_USB451_IC1 XTX1_USB451_L1 XTX1_USB451_L2 XTX1_USB451_L3 XTX1_USB451_L4 XTX1_USB451_TVS1 XTX1_USB451_TVS2
component class XTX1_USB452: XTX1_USB452_C1 XTX1_USB452_C2 XTX1_USB452_C3 XTX1_USB452_C4 XTX1_USB452_C5 XTX1_USB452_C6 XTX1_USB452_C7 XTX1_USB452_IC1 XTX1_USB452_L1 XTX1_USB452_L2 XTX1_USB452_L3 XTX1_USB452_L4 XTX1_USB452_TVS1 XTX1_USB452_TVS2
component class XTX1_VGA1: XTX1_VGA1_C6_0 XTX1_VGA1_C6_1 XTX1_VGA1_C6_2 XTX1_VGA1_C6_3 XTX1_VGA1_C6_4 XTX1_VGA1_C6_5 XTX1_VGA1_C6_6 XTX1_VGA1_C6_7 XTX1_VGA1_D6_0 XTX1_VGA1_D6_1 XTX1_VGA1_D6_2 XTX1_VGA1_D6_3 XTX1_VGA1_D6_4 XTX1_VGA1_FB6_0 XTX1_VGA1_FB6_1 XTX1_VGA1_FB6_2 XTX1_VGA1_FB6_3 XTX1_VGA1_FB6_4 XTX1_VGA1_FB6_5 XTX1_VGA1_FB6_6 XTX1_VGA1_FB6_7 XTX1_VGA1_R6_0 XTX1_VGA1_R6_1 XTX1_VGA1_R6_2 XTX1_VGA1_R6_3 XTX1_VGA1_VGA6_0
component class XTX1_VGA2: XTX1_VGA2_C6_0 XTX1_VGA2_C6_1 XTX1_VGA2_C6_2 XTX1_VGA2_C6_3 XTX1_VGA2_C6_4 XTX1_VGA2_C6_5 XTX1_VGA2_C6_6 XTX1_VGA2_C6_7 XTX1_VGA2_D6_0 XTX1_VGA2_D6_1 XTX1_VGA2_D6_2 XTX1_VGA2_D6_3 XTX1_VGA2_D6_4 XTX1_VGA2_FB6_0 XTX1_VGA2_FB6_1 XTX1_VGA2_FB6_2 XTX1_VGA2_FB6_3 XTX1_VGA2_FB6_4 XTX1_VGA2_FB6_5 XTX1_VGA2_FB6_6 XTX1_VGA2_FB6_7 XTX1_VGA2_R6_0 XTX1_VGA2_R6_1 XTX1_VGA2_R6_2 XTX1_VGA2_R6_3 XTX1_VGA2_VGA6_0
component class XTX2: XTX2_I2C XTX2_IL_SATA# "XTX2_RS232 1" "XTX2_RS232 2" "XTX2_TTL Serial 1" "XTX2_TTL Serial 2" XTX2_USB1 XTX2_USB2 XTX2_USB3 XTX2_USB4 XTX2_USB5 XTX2_USB6 XTX12_IL_SATA#
channel class EthernetMagJack: EthernetJack1 EthernetJack2
channel class LEDSandButtons: XTX1_Interface1 XTX1_Interface2
channel class SATA: XTX1_SATA1 XTX1_SATA2
channel class SerialLvlConvert: XTX1_Serial_Drvs1 XTX1_Serial_Drvs2
channel class USB: XTX1_USB011 XTX1_USB012 XTX1_USB231 XTX1_USB232 XTX1_USB451 XTX1_USB452
channel class VGA: XTX1_VGA1 XTX1_VGA2
channel class XTX: XTX12 XTX13
channel class XTXBoard2: XTX12 XTX13
component class XTX11: XTX11_BATT1 XTX11_C16 XTX11_D*1 XTX11_R8 XTX11_XTX
component class XTX13: XTX11_IL_SATA# XTX13_I2C XTX13_IL_SATA# "XTX13_RS232 1" "XTX13_RS232 2" "XTX13_TTL Serial 1" "XTX13_TTL Serial 2" XTX13_USB1 XTX13_USB2 XTX13_USB3 XTX13_USB4 XTX13_USB5 XTX13_USB6
component class XTX12: XTX12_BATT1 XTX12_C16 XTX12_D*1 XTX12_R8 XTX12_XTX
component class MainSheet: "12V Out" "Power In"
differential pair XTX1_SATA2_SATAIN_RX: +XTX1_SATA2_SATAIN_RX_P -XTX1_SATA2_SATAIN_RX_N
differential pair XTX1_SATA2_SATAIN_TX: +XTX1_SATA2_SATAIN_TX_P -XTX1_SATA2_SATAIN_TX_N
differential pair XTX1_USB012_OUT_USBA: +XTX1_USB012_OUT_USBA_P -XTX1_USB012_OUT_USBA_N
differential pair XTX1_USB012_OUT_USBB: +XTX1_USB012_OUT_USBB_P -XTX1_USB012_OUT_USBB_N
differential pair XTX1_USB232_OUT_USBA: +XTX1_USB232_OUT_USBA_P -XTX1_USB232_OUT_USBA_N
differential pair XTX1_USB232_OUT_USBB: +XTX1_USB232_OUT_USBB_P -XTX1_USB232_OUT_USBB_N
differential pair XTX1_USB452_OUT_USBA: +XTX1_USB452_OUT_USBA_P -XTX1_USB452_OUT_USBA_N
differential pair XTX1_USB452_OUT_USBB: +XTX1_USB452_OUT_USBB_P -XTX1_USB452_OUT_USBB_N
differential pair XTX1_SATA1_SATAIN_RX: +XTX1_SATA1_SATAIN_RX_P -XTX1_SATA1_SATAIN_RX_N
differential pair XTX1_SATA1_SATAIN_TX: +XTX1_SATA1_SATAIN_TX_P -XTX1_SATA1_SATAIN_TX_N
differential pair XTX1_USB011_OUT_USBA: +XTX1_USB011_OUT_USBA_P -XTX1_USB011_OUT_USBA_N
differential pair XTX1_USB011_OUT_USBB: +XTX1_USB011_OUT_USBB_P -XTX1_USB011_OUT_USBB_N
differential pair XTX1_USB231_OUT_USBA: +XTX1_USB231_OUT_USBA_P -XTX1_USB231_OUT_USBA_N
differential pair XTX1_USB231_OUT_USBB: +XTX1_USB231_OUT_USBB_P -XTX1_USB231_OUT_USBB_N
differential pair XTX1_USB451_OUT_USBA: +XTX1_USB451_OUT_USBA_P -XTX1_USB451_OUT_USBA_N
differential pair XTX1_USB451_OUT_USBB: +XTX1_USB451_OUT_USBB_P -XTX1_USB451_OUT_USBB_N
differential pair XTX11_ETH_RXD: +XTX11_ETH_RXD_P -XTX11_ETH_RXD_N
differential pair XTX11_ETH_TXD: +XTX11_ETH_TXD_P -XTX11_ETH_TXD_N
differential pair XTX12_ETH_RXD: +XTX12_ETH_RXD_P -XTX12_ETH_RXD_N
differential pair XTX12_ETH_TXD: +XTX12_ETH_TXD_P -XTX12_ETH_TXD_N

## Components (designator, comment, footprint, x,y, rotation, side; value= is the part's Value field where it differs from the comment)
"12V Out" "5569 Mini-Fit Jr 8-Pos Right Angle" "8-POS 5569 Mini-Fit Jr 2" 12110.08,3179.03 r90 top
EthernetJack1_C25 "Cap Semi" 0402 3543.86,1793.23 r270 bottom (schematic designator C25)
EthernetJack1_C26 "Cap Semi" 0402 3543.86,1948.82 r270 bottom (schematic designator C26)
EthernetJack1_Eth1 "48025-0002" 48025-0002 3967.17,1929.13 r270 bottom locked (schematic designator Eth1)
EthernetJack2_C25 "Cap Semi" 0402 7081.97,2020.06 r90 bottom (schematic designator C25)
EthernetJack2_C26 "Cap Semi" 0402 7071.97,1872.01 r90 bottom (schematic designator C26)
EthernetJack2_Eth1 "48025-0002" 48025-0002 6610.51,1929.13 r90 bottom locked (schematic designator Eth1)
"Power In" "5569 Mini-Fit Jr 10-Pos Right Angle" "10-Pos 5569 Mini-Fit Jr 2" 10841.89,3034.46 r90 top
XTX1_Interface1_5V "LED2" C0805 3233.25,5201.82 r180 top (schematic designator 5V)
"XTX1_Interface1_Eth Act" "LED2" C0805 3500.02,5647.77 r180 top (schematic designator "Eth Act")
"XTX1_Interface1_Eth Lil" "LED2" C0805 3677.46,5369.94 r270 top (schematic designator "Eth Lil")
"XTX1_Interface1_Eth Spd" "LED2" C0805 3064.73,5357.82 r270 top (schematic designator "Eth Spd")
XTX1_Interface1_Power "FSM Switch" FSM4JH 3505.12,5417.14 r90 top (schematic designator Power)
XTX1_Interface1_R14 "Res Semi" 1005[0402] 3065.58,5498.13 r270 top (schematic designator R14)
XTX1_Interface1_R15 "Res Semi" 1005[0402] 3640.34,5661.31 r180 top (schematic designator R15)
XTX1_Interface1_R16 "Res Semi" 1005[0402] 3686.81,5510.26 r270 top (schematic designator R16)
XTX1_Interface1_R17 "Res Semi" 1005[0402] 3372.46,5653.41 r180 top (schematic designator R17)
XTX1_Interface1_R18 "Res Semi" 1005[0402] 3379.24,5207.87 r180 top (schematic designator R18)
XTX1_Interface1_Reset "FSM Switch" FSM4JH 3238.9,5417.14 r90 top (schematic designator Reset)
XTX1_Interface1_SATA "LED2" C0805 3232.15,5647.99 r180 top (schematic designator SATA)
XTX1_Interface2_5V "LED2" C0805 5806.86,5506.94 r90 top (schematic designator 5V)
"XTX1_Interface2_Eth Act" "LED2" C0805 5893.91,5506.94 r90 top (schematic designator "Eth Act")
"XTX1_Interface2_Eth Lil" "LED2" C0805 5545.69,5506.94 r90 top (schematic designator "Eth Lil")
"XTX1_Interface2_Eth Spd" "LED2" C0805 5632.75,5506.94 r90 top (schematic designator "Eth Spd")
XTX1_Interface2_Power "FSM Switch" FSM4JH 5369.05,5392.77 r90 top (schematic designator Power)
XTX1_Interface2_R14 "Res Semi" 1005[0402] 6131.9,5526.63 r90 top (schematic designator R14)
XTX1_Interface2_R15 "Res Semi" 1005[0402] 6187.46,5526.63 r90 top (schematic designator R15)
XTX1_Interface2_R16 "Res Semi" 1005[0402] 6076.34,5526.63 r90 top (schematic designator R16)
XTX1_Interface2_R17 "Res Semi" 1005[0402] 5965.22,5526.63 r90 top (schematic designator R17)
XTX1_Interface2_R18 "Res Semi" 1005[0402] 6020.78,5526.63 r90 top (schematic designator R18)
XTX1_Interface2_Reset "FSM Switch" FSM4JH 5102.83,5392.77 r90 top (schematic designator Reset)
XTX1_Interface2_SATA "LED2" C0805 5719.8,5506.94 r90 top (schematic designator SATA)
XTX1_SATA1_C4_0 "10uF" "1210 (3225) Capacitor" 1227.83,3120.91 r270 bottom (schematic designator C4_0)
XTX1_SATA1_C4_1 "10uF" "1210 (3225) Capacitor" 1386.77,3120.91 r270 bottom (schematic designator C4_1)
XTX1_SATA1_C4_2 "10uF" "1210 (3225) Capacitor" 1068.9,3120.91 r270 bottom (schematic designator C4_2)
XTX1_SATA1_SATA4_0 "SATA Drive" "SATA HDD" 1758.35,2992.13 r0 bottom locked (schematic designator SATA4_0)
XTX1_SATA2_C4_0 "10uF" "1210 (3225) Capacitor" 9384.8,3112.72 r270 bottom (schematic designator C4_0)
XTX1_SATA2_C4_1 "10uF" "1210 (3225) Capacitor" 9543.74,3112.72 r270 bottom (schematic designator C4_1)
XTX1_SATA2_C4_2 "10uF" "1210 (3225) Capacitor" 9225.87,3112.72 r270 bottom (schematic designator C4_2)
XTX1_SATA2_SATA4_0 "SATA Drive" "SATA HDD" 8844.68,866.14 r180 bottom locked (schematic designator SATA4_0)
XTX1_Serial_Drvs1_C20 "Cap Semi" 0402 3901.32,8061.39 r90 top (schematic designator C20)
XTX1_Serial_Drvs1_C21 "Cap Semi" 0402 3901.32,7801.39 r90 top (schematic designator C21)
XTX1_Serial_Drvs1_C22 "Cap Semi" 0402 3901.32,7931.39 r90 top (schematic designator C22)
XTX1_Serial_Drvs1_C23 "Cap Semi" 0402 3512,7801.39 r90 top (schematic designator C23)
XTX1_Serial_Drvs1_C24 "Cap Semi" 0402 3512,8049.65 r270 top (schematic designator C24)
XTX1_Serial_Drvs1_U1 "MAX232ACSE" NSO16_N 3700.91,7934.88 r180 top (schematic designator U1)
XTX1_Serial_Drvs2_C20 "Cap Semi" 0402 8074.47,6496.41 r180 top (schematic designator C20)
XTX1_Serial_Drvs2_C21 "Cap Semi" 0402 8074.47,6440.85 r180 top (schematic designator C21)
XTX1_Serial_Drvs2_C22 "Cap Semi" 0402 8074.47,6551.97 r180 top (schematic designator C22)
XTX1_Serial_Drvs2_C23 "Cap Semi" 0402 8074.47,6663.09 r180 top (schematic designator C23)
XTX1_Serial_Drvs2_C24 "Cap Semi" 0402 8074.47,6607.53 r180 top (schematic designator C24)
XTX1_Serial_Drvs2_U1 "MAX232ACSE" NSO16_N 8176.77,6194.41 r180 top (schematic designator U1)
XTX1_USB011_C1 "Cap Semi" 0402 -447.7,3314.9 r90 top (schematic designator C1)
XTX1_USB011_C2 "Cap Semi" C1210 -294.79,3808.57 r270 top (schematic designator C2)
XTX1_USB011_C3 "Cap Semi" C1210 -428.14,3808.57 r270 top (schematic designator C3)
XTX1_USB011_C4 "Cap Semi" 0402 -574.54,3147.66 r180 top (schematic designator C4)
XTX1_USB011_C5 "Cap Semi" 0402 -574.54,3209.32 r180 top (schematic designator C5)
XTX1_USB011_C6 "Cap Semi" 0402 -574.54,3490.98 r180 top (schematic designator C6)
XTX1_USB011_C7 "Cap Semi" 0402 -574.54,3552.64 r180 top (schematic designator C7)
XTX1_USB011_IC1 "Micrel MIC2026" "8-Pin SOIC" -358.98,3531.34 r90 top (schematic designator IC1)
XTX1_USB011_L1 "Inductor" 0402-A -672.46,3547.61 r0 top (schematic designator L1)
XTX1_USB011_L2 "Inductor" 0402-A -672.46,3488.65 r0 top (schematic designator L2)
XTX1_USB011_L3 "Inductor" 0402-A -672.46,3209.69 r0 top (schematic designator L3)
XTX1_USB011_L4 "Inductor" 0402-A -672.46,3150.73 r0 top (schematic designator L4)
XTX1_USB011_TVS1 "SR05.TCT" SOT143 -615,3683.83 r0 top (schematic designator TVS1)
XTX1_USB011_TVS2 "SR05.TCT" SOT143 -325.71,3239.05 r0 top (schematic designator TVS2)
XTX1_USB012_C1 "Cap Semi" 0402 12017.31,698.17 r270 top (schematic designator C1)
XTX1_USB012_C2 "Cap Semi" C1210 11864.39,204.5 r90 top (schematic designator C2)
XTX1_USB012_C3 "Cap Semi" C1210 11997.75,204.5 r90 top (schematic designator C3)
XTX1_USB012_C4 "Cap Semi" 0402 12144.15,865.41 r0 top (schematic designator C4)
XTX1_USB012_C5 "Cap Semi" 0402 12144.15,803.75 r0 top (schematic designator C5)
XTX1_USB012_C6 "Cap Semi" 0402 12144.15,522.09 r0 top (schematic designator C6)
XTX1_USB012_C7 "Cap Semi" 0402 12144.15,460.43 r0 top (schematic designator C7)
XTX1_USB012_IC1 "Micrel MIC2026" "8-Pin SOIC" 11928.58,481.73 r270 top (schematic designator IC1)
XTX1_USB012_L1 "Inductor" 0402-A 12242.07,465.46 r180 top (schematic designator L1)
XTX1_USB012_L2 "Inductor" 0402-A 12242.07,524.42 r180 top (schematic designator L2)
XTX1_USB012_L3 "Inductor" 0402-A 12242.07,803.38 r180 top (schematic designator L3)
XTX1_USB012_L4 "Inductor" 0402-A 12242.07,862.34 r180 top (schematic designator L4)
XTX1_USB012_TVS1 "SR05.TCT" SOT143 12184.61,329.24 r180 top (schematic designator TVS1)
XTX1_USB012_TVS2 "SR05.TCT" SOT143 12195.31,654.02 r180 top (schematic designator TVS2)
XTX1_USB231_C1 "Cap Semi" 0402 12036.87,2247.93 r90 top (schematic designator C1)
XTX1_USB231_C2 "Cap Semi" C1210 12189.78,2741.6 r270 top (schematic designator C2)
XTX1_USB231_C3 "Cap Semi" C1210 12056.43,2741.6 r270 top (schematic designator C3)
XTX1_USB231_C4 "Cap Semi" 0402 11910.02,2080.69 r180 top (schematic designator C4)
XTX1_USB231_C5 "Cap Semi" 0402 11910.02,2142.35 r180 top (schematic designator C5)
XTX1_USB231_C6 "Cap Semi" 0402 11910.02,2424.01 r180 top (schematic designator C6)
XTX1_USB231_C7 "Cap Semi" 0402 11910.02,2485.67 r180 top (schematic designator C7)
XTX1_USB231_IC1 "Micrel MIC2026" "8-Pin SOIC" 12125.59,2464.37 r90 top (schematic designator IC1)
XTX1_USB231_L1 "Inductor" 0402-A 11812.1,2480.65 r0 top (schematic designator L1)
XTX1_USB231_L2 "Inductor" 0402-A 11812.1,2421.68 r0 top (schematic designator L2)
XTX1_USB231_L3 "Inductor" 0402-A 11812.1,2142.72 r0 top (schematic designator L3)
XTX1_USB231_L4 "Inductor" 0402-A 11812.1,2083.76 r0 top (schematic designator L4)
XTX1_USB231_TVS1 "SR05.TCT" SOT143 11869.57,2616.87 r0 top (schematic designator TVS1)
XTX1_USB231_TVS2 "SR05.TCT" SOT143 11858.86,2292.09 r0 top (schematic designator TVS2)
XTX1_USB232_C1 "Cap Semi" 0402 12021.24,1728.49 r270 top (schematic designator C1)
XTX1_USB232_C2 "Cap Semi" C1210 11868.33,1234.82 r90 top (schematic designator C2)
XTX1_USB232_C3 "Cap Semi" C1210 12001.68,1234.82 r90 top (schematic designator C3)
XTX1_USB232_C4 "Cap Semi" 0402 12148.09,1895.72 r0 top (schematic designator C4)
XTX1_USB232_C5 "Cap Semi" 0402 12148.09,1834.07 r0 top (schematic designator C5)
XTX1_USB232_C6 "Cap Semi" 0402 12148.09,1552.41 r0 top (schematic designator C6)
XTX1_USB232_C7 "Cap Semi" 0402 12148.09,1490.75 r0 top (schematic designator C7)
XTX1_USB232_IC1 "Micrel MIC2026" "8-Pin SOIC" 11932.52,1512.05 r270 top (schematic designator IC1)
XTX1_USB232_L1 "Inductor" 0402-A 12246.01,1495.77 r180 top (schematic designator L1)
XTX1_USB232_L2 "Inductor" 0402-A 12246.01,1554.73 r180 top (schematic designator L2)
XTX1_USB232_L3 "Inductor" 0402-A 12246.01,1833.69 r180 top (schematic designator L3)
XTX1_USB232_L4 "Inductor" 0402-A 12246.01,1892.65 r180 top (schematic designator L4)
XTX1_USB232_TVS1 "SR05.TCT" SOT143 12188.54,1359.55 r180 top (schematic designator TVS1)
XTX1_USB232_TVS2 "SR05.TCT" SOT143 12199.25,1684.33 r180 top (schematic designator TVS2)
XTX1_USB451_C1 "Cap Semi" 0402 -497.94,484.86 r90 top (schematic designator C1)
XTX1_USB451_C2 "Cap Semi" C1210 -345.02,978.53 r270 top (schematic designator C2)
XTX1_USB451_C3 "Cap Semi" C1210 -478.38,978.53 r270 top (schematic designator C3)
XTX1_USB451_C4 "Cap Semi" 0402 -624.78,317.62 r180 top (schematic designator C4)
XTX1_USB451_C5 "Cap Semi" 0402 -624.78,379.28 r180 top (schematic designator C5)
XTX1_USB451_C6 "Cap Semi" 0402 -624.78,660.94 r180 top (schematic designator C6)
XTX1_USB451_C7 "Cap Semi" 0402 -624.78,722.6 r180 top (schematic designator C7)
XTX1_USB451_IC1 "Micrel MIC2026" "8-Pin SOIC" -409.21,701.3 r90 top (schematic designator IC1)
XTX1_USB451_L1 "Inductor" 0402-A -722.7,717.58 r0 top (schematic designator L1)
XTX1_USB451_L2 "Inductor" 0402-A -722.7,658.61 r0 top (schematic designator L2)
XTX1_USB451_L3 "Inductor" 0402-A -722.7,379.65 r0 top (schematic designator L3)
XTX1_USB451_L4 "Inductor" 0402-A -722.7,320.69 r0 top (schematic designator L4)
XTX1_USB451_TVS1 "SR05.TCT" SOT143 -665.24,853.79 r0 top (schematic designator TVS1)
XTX1_USB451_TVS2 "SR05.TCT" SOT143 -675.94,529.02 r0 top (schematic designator TVS2)
XTX1_USB452_C1 "Cap Semi" 0402 -486.48,1739.62 r90 top (schematic designator C1)
XTX1_USB452_C2 "Cap Semi" C1210 -333.57,2233.29 r270 top (schematic designator C2)
XTX1_USB452_C3 "Cap Semi" C1210 -466.92,2233.29 r270 top (schematic designator C3)
XTX1_USB452_C4 "Cap Semi" 0402 -613.32,1572.39 r180 top (schematic designator C4)
XTX1_USB452_C5 "Cap Semi" 0402 -613.32,1634.05 r180 top (schematic designator C5)
XTX1_USB452_C6 "Cap Semi" 0402 -613.32,1915.7 r180 top (schematic designator C6)
XTX1_USB452_C7 "Cap Semi" 0402 -613.32,1977.36 r180 top (schematic designator C7)
XTX1_USB452_IC1 "Micrel MIC2026" "8-Pin SOIC" -397.76,1956.06 r90 top (schematic designator IC1)
XTX1_USB452_L1 "Inductor" 0402-A -711.24,1972.34 r0 top (schematic designator L1)
XTX1_USB452_L2 "Inductor" 0402-A -711.24,1913.38 r0 top (schematic designator L2)
XTX1_USB452_L3 "Inductor" 0402-A -711.24,1634.42 r0 top (schematic designator L3)
XTX1_USB452_L4 "Inductor" 0402-A -711.24,1575.46 r0 top (schematic designator L4)
XTX1_USB452_TVS1 "SR05.TCT" SOT143 -653.78,2108.56 r0 top (schematic designator TVS1)
XTX1_USB452_TVS2 "SR05.TCT" SOT143 -664.49,1783.78 r0 top (schematic designator TVS2)
XTX1_VGA1_C6_0 "3.3pF" "0805 (2012) Capacitor" 4079.49,2702.72 r90 bottom (schematic designator C6_0)
XTX1_VGA1_C6_1 "3.3pF" "0805 (2012) Capacitor" 4076.69,2902.72 r90 bottom (schematic designator C6_1)
XTX1_VGA1_C6_2 "3.3pF" "0805 (2012) Capacitor" 4073.9,3082.72 r90 bottom (schematic designator C6_2)
XTX1_VGA1_C6_3 "3.3pF" "0805 (2012) Capacitor" 3814.17,2702.72 r270 bottom (schematic designator C6_3)
XTX1_VGA1_C6_4 "3.3pF" "0805 (2012) Capacitor" 3808.58,2902.72 r270 bottom (schematic designator C6_4)
XTX1_VGA1_C6_5 "3.3pF" "0805 (2012) Capacitor" 3802.99,3082.72 r270 bottom (schematic designator C6_5)
XTX1_VGA1_C6_6 "10pF 50V" "0805 (2012) Capacitor" 3187.8,3082.72 r270 bottom (schematic designator C6_6)
XTX1_VGA1_C6_7 "10pF 50V" "0805 (2012) Capacitor" 3193.39,2902.72 r270 bottom (schematic designator C6_7)
XTX1_VGA1_D6_0 "SOT23" SOT23 4367.44,2716.51 r180 bottom (schematic designator D6_0)
XTX1_VGA1_D6_1 "Dual Schottky Diode" SOT23 4367.44,2916.51 r180 bottom (schematic designator D6_1)
XTX1_VGA1_D6_2 "Dual Schottky Diode" SOT23 4367.44,3096.51 r180 bottom (schematic designator D6_2)
XTX1_VGA1_D6_3 "SOT23" SOT23 3354.02,3096.51 r180 bottom (schematic designator D6_3)
XTX1_VGA1_D6_4 "Dual Schottky Diode" SOT23 3349.21,2916.51 r180 bottom (schematic designator D6_4)
XTX1_VGA1_FB6_0 "200mA" "0805 (2012) Capacitor" 3946.83,2702.72 r90 bottom (schematic designator FB6_0)
XTX1_VGA1_FB6_1 "200mA" "0805 (2012) Capacitor" 3942.64,2902.72 r90 bottom (schematic designator FB6_1)
XTX1_VGA1_FB6_2 "200mA" "0805 (2012) Capacitor" 3938.44,3082.72 r90 bottom (schematic designator FB6_2)
XTX1_VGA1_FB6_3 "200mA" "0805 (2012) Capacitor" 3658.66,3082.72 r90 bottom (schematic designator FB6_3)
XTX1_VGA1_FB6_4 "200mA" "0805 (2012) Capacitor" 4489.84,3322.72 r90 bottom (schematic designator FB6_4)
XTX1_VGA1_FB6_5 "200mA" "0805 (2012) Capacitor" 3514.96,3082.72 r270 bottom (schematic designator FB6_5)
XTX1_VGA1_FB6_6 "200mA" "0805 (2012) Capacitor" 3519.76,2902.72 r270 bottom (schematic designator FB6_6)
XTX1_VGA1_FB6_7 "200mA" "0805 (2012) Capacitor" 4494.65,3482.72 r90 bottom (schematic designator FB6_7)
XTX1_VGA1_R6_0 "150_Ohm" "R 0805 (2012) RESISTOR" 4212.15,2702.72 r270 bottom (schematic designator R6_0)
XTX1_VGA1_R6_1 "150Ohm 1%" "R 0805 (2012) RESISTOR" 4210.75,2902.72 r270 bottom (schematic designator R6_1)
XTX1_VGA1_R6_2 "150Ohm 1%" "R 0805 (2012) RESISTOR" 4209.35,3082.72 r270 bottom (schematic designator R6_2)
XTX1_VGA1_R6_3 "0Ohm" "R 1210 (3225) RESISTOR" 3659.84,2876.14 r90 bottom (schematic designator R6_3)
XTX1_VGA1_VGA6_0 "DSub15" DSub15 3779.57,3421.57 r180 bottom (schematic designator VGA6_0)
XTX1_VGA2_C6_0 "3.3pF" "0805 (2012) Capacitor" 7398.39,2749.96 r90 bottom (schematic designator C6_0)
XTX1_VGA2_C6_1 "3.3pF" "0805 (2012) Capacitor" 7395.59,2949.96 r90 bottom (schematic designator C6_1)
XTX1_VGA2_C6_2 "3.3pF" "0805 (2012) Capacitor" 7392.8,3129.96 r90 bottom (schematic designator C6_2)
XTX1_VGA2_C6_3 "3.3pF" "0805 (2012) Capacitor" 7133.07,2749.96 r270 bottom (schematic designator C6_3)
XTX1_VGA2_C6_4 "3.3pF" "0805 (2012) Capacitor" 7127.48,2949.96 r270 bottom (schematic designator C6_4)
XTX1_VGA2_C6_5 "3.3pF" "0805 (2012) Capacitor" 7121.89,3129.96 r270 bottom (schematic designator C6_5)
XTX1_VGA2_C6_6 "10pF 50V" "0805 (2012) Capacitor" 6506.69,3129.96 r270 bottom (schematic designator C6_6)
XTX1_VGA2_C6_7 "10pF 50V" "0805 (2012) Capacitor" 6512.28,2949.96 r270 bottom (schematic designator C6_7)
XTX1_VGA2_D6_0 "SOT23" SOT23 7686.34,2763.76 r180 bottom (schematic designator D6_0)
XTX1_VGA2_D6_1 "Dual Schottky Diode" SOT23 7686.34,2963.76 r180 bottom (schematic designator D6_1)
XTX1_VGA2_D6_2 "Dual Schottky Diode" SOT23 7686.34,3143.76 r180 bottom (schematic designator D6_2)
XTX1_VGA2_D6_3 "SOT23" SOT23 6672.91,3143.76 r180 bottom (schematic designator D6_3)
XTX1_VGA2_D6_4 "Dual Schottky Diode" SOT23 6668.11,2963.76 r180 bottom (schematic designator D6_4)
XTX1_VGA2_FB6_0 "200mA" "0805 (2012) Capacitor" 7265.73,2749.96 r90 bottom (schematic designator FB6_0)
XTX1_VGA2_FB6_1 "200mA" "0805 (2012) Capacitor" 7261.54,2949.96 r90 bottom (schematic designator FB6_1)
XTX1_VGA2_FB6_2 "200mA" "0805 (2012) Capacitor" 7257.34,3129.96 r90 bottom (schematic designator FB6_2)
XTX1_VGA2_FB6_3 "200mA" "0805 (2012) Capacitor" 6977.56,3129.96 r90 bottom (schematic designator FB6_3)
XTX1_VGA2_FB6_4 "200mA" "0805 (2012) Capacitor" 7808.74,3369.96 r90 bottom (schematic designator FB6_4)
XTX1_VGA2_FB6_5 "200mA" "0805 (2012) Capacitor" 6833.86,3129.96 r270 bottom (schematic designator FB6_5)
XTX1_VGA2_FB6_6 "200mA" "0805 (2012) Capacitor" 6838.66,2949.96 r270 bottom (schematic designator FB6_6)
XTX1_VGA2_FB6_7 "200mA" "0805 (2012) Capacitor" 7813.54,3529.96 r90 bottom (schematic designator FB6_7)
XTX1_VGA2_R6_0 "150_Ohm" "R 0805 (2012) RESISTOR" 7531.04,2749.96 r270 bottom (schematic designator R6_0)
XTX1_VGA2_R6_1 "150Ohm 1%" "R 0805 (2012) RESISTOR" 7529.65,2949.96 r270 bottom (schematic designator R6_1)
XTX1_VGA2_R6_2 "150Ohm 1%" "R 0805 (2012) RESISTOR" 7528.25,3129.96 r270 bottom (schematic designator R6_2)
XTX1_VGA2_R6_3 "0Ohm" "R 1210 (3225) RESISTOR" 6978.74,2923.39 r90 bottom (schematic designator R6_3)
XTX1_VGA2_VGA6_0 "DSub15" DSub15 7098.46,3468.82 r180 bottom (schematic designator VGA6_0)
XTX2_I2C "Header 4" HDR1X4 7299.43,5922.32 r90 top (schematic designator I2C)
XTX2_IL_SATA# "Header 3" HDR1X3 7683.05,6022.32 r90 top (schematic designator IL_SATA#)
"XTX2_RS232 1" "Header 4" HDR1X4 7555.18,5922.32 r90 top (schematic designator "RS232 1")
"XTX2_RS232 2" "Header 4" HDR1X4 7427.31,5922.32 r90 top (schematic designator "RS232 2")
"XTX2_TTL Serial 1" "Header 4X2" HDR2X4 7620.31,6474.94 r90 top (schematic designator "TTL Serial 1")
"XTX2_TTL Serial 2" "Header 4X2" HDR2X4 7392.44,6474.94 r90 top (schematic designator "TTL Serial 2")
XTX2_USB1 "UX60-MB-5ST" UX60-MB-5ST 11025.75,242.31 r270 bottom (schematic designator USB1)
XTX2_USB2 "UX60-MB-5ST" UX60-MB-5ST 11025.75,728.02 r270 bottom (schematic designator USB2)
XTX2_USB3 "UX60-MB-5ST" UX60-MB-5ST 11025.75,1213.72 r270 bottom (schematic designator USB3)
XTX2_USB4 "UX60-MB-5ST" UX60-MB-5ST 11025.75,1699.43 r270 bottom (schematic designator USB4)
XTX2_USB5 "UX60-MB-5ST" UX60-MB-5ST 378,2117.69 r90 bottom (schematic designator USB5)
XTX2_USB6 "UX60-MB-5ST" UX60-MB-5ST 378,1657.69 r90 bottom (schematic designator USB6)
XTX11_BATT1 "BH600" BH600 3909.21,6872.28 r180 top (schematic designator BATT1)
XTX11_C16 "Cap Semi" C1210 3357.02,7297.1 r90 top (schematic designator C16)
XTX11_D*1 "BAV99" SOT-23 3506.08,7328.6 r90 top (schematic designator D*1)
XTX11_R8 "Res Semi" 1005[0402] 3615.77,7340.41 r90 top (schematic designator R8)
XTX11_XTX "XTX_Board" XTX_Board 510.83,3797.24 r180 top locked (schematic designator XTX)
XTX12_BATT1 "BH600" BH600 7547.52,5110.24 r90 top (schematic designator BATT1)
XTX12_C16 "Cap Semi" C1210 7379.76,5662.52 r270 top (schematic designator C16)
XTX12_D*1 "BAV99" SOT-23 7655.24,5652.48 r90 top (schematic designator D*1)
XTX12_R8 "Res Semi" 1005[0402] 7519.76,5657.52 r270 top (schematic designator R8)
XTX12_XTX "XTX_Board" XTX_Board 10070.14,61.02 r0 top locked (schematic designator XTX)
XTX13_I2C "Header 4" HDR1X4 2842.31,7033.78 r90 top (schematic designator I2C)
XTX13_IL_SATA# "Header 3" HDR1X3 3225.93,7133.78 r90 top (schematic designator IL_SATA#)
"XTX13_RS232 1" "Header 4" HDR1X4 2970.18,7033.78 r90 top (schematic designator "RS232 1")
"XTX13_RS232 2" "Header 4" HDR1X4 3098.05,7033.78 r90 top (schematic designator "RS232 2")
"XTX13_TTL Serial 1" "Header 4X2" HDR2X4 2955.31,7746.39 r90 top (schematic designator "TTL Serial 1")
"XTX13_TTL Serial 2" "Header 4X2" HDR2X4 3183.19,7746.39 r90 top (schematic designator "TTL Serial 2")